# Altium PCB CT310高端控制盒核心板电路V1.3.PcbDoc (part 9 of 10)
Units mil, origin at the board's own origin, x right, y up, seen from the top; angles counter-clockwise.
Board outline 3735.76 x 4625 mil, 2 copper layers (TOP, BOTTOM), stack 10.4 mil thick; 198 components, 362 nets, 1085 pads, 352 vias.
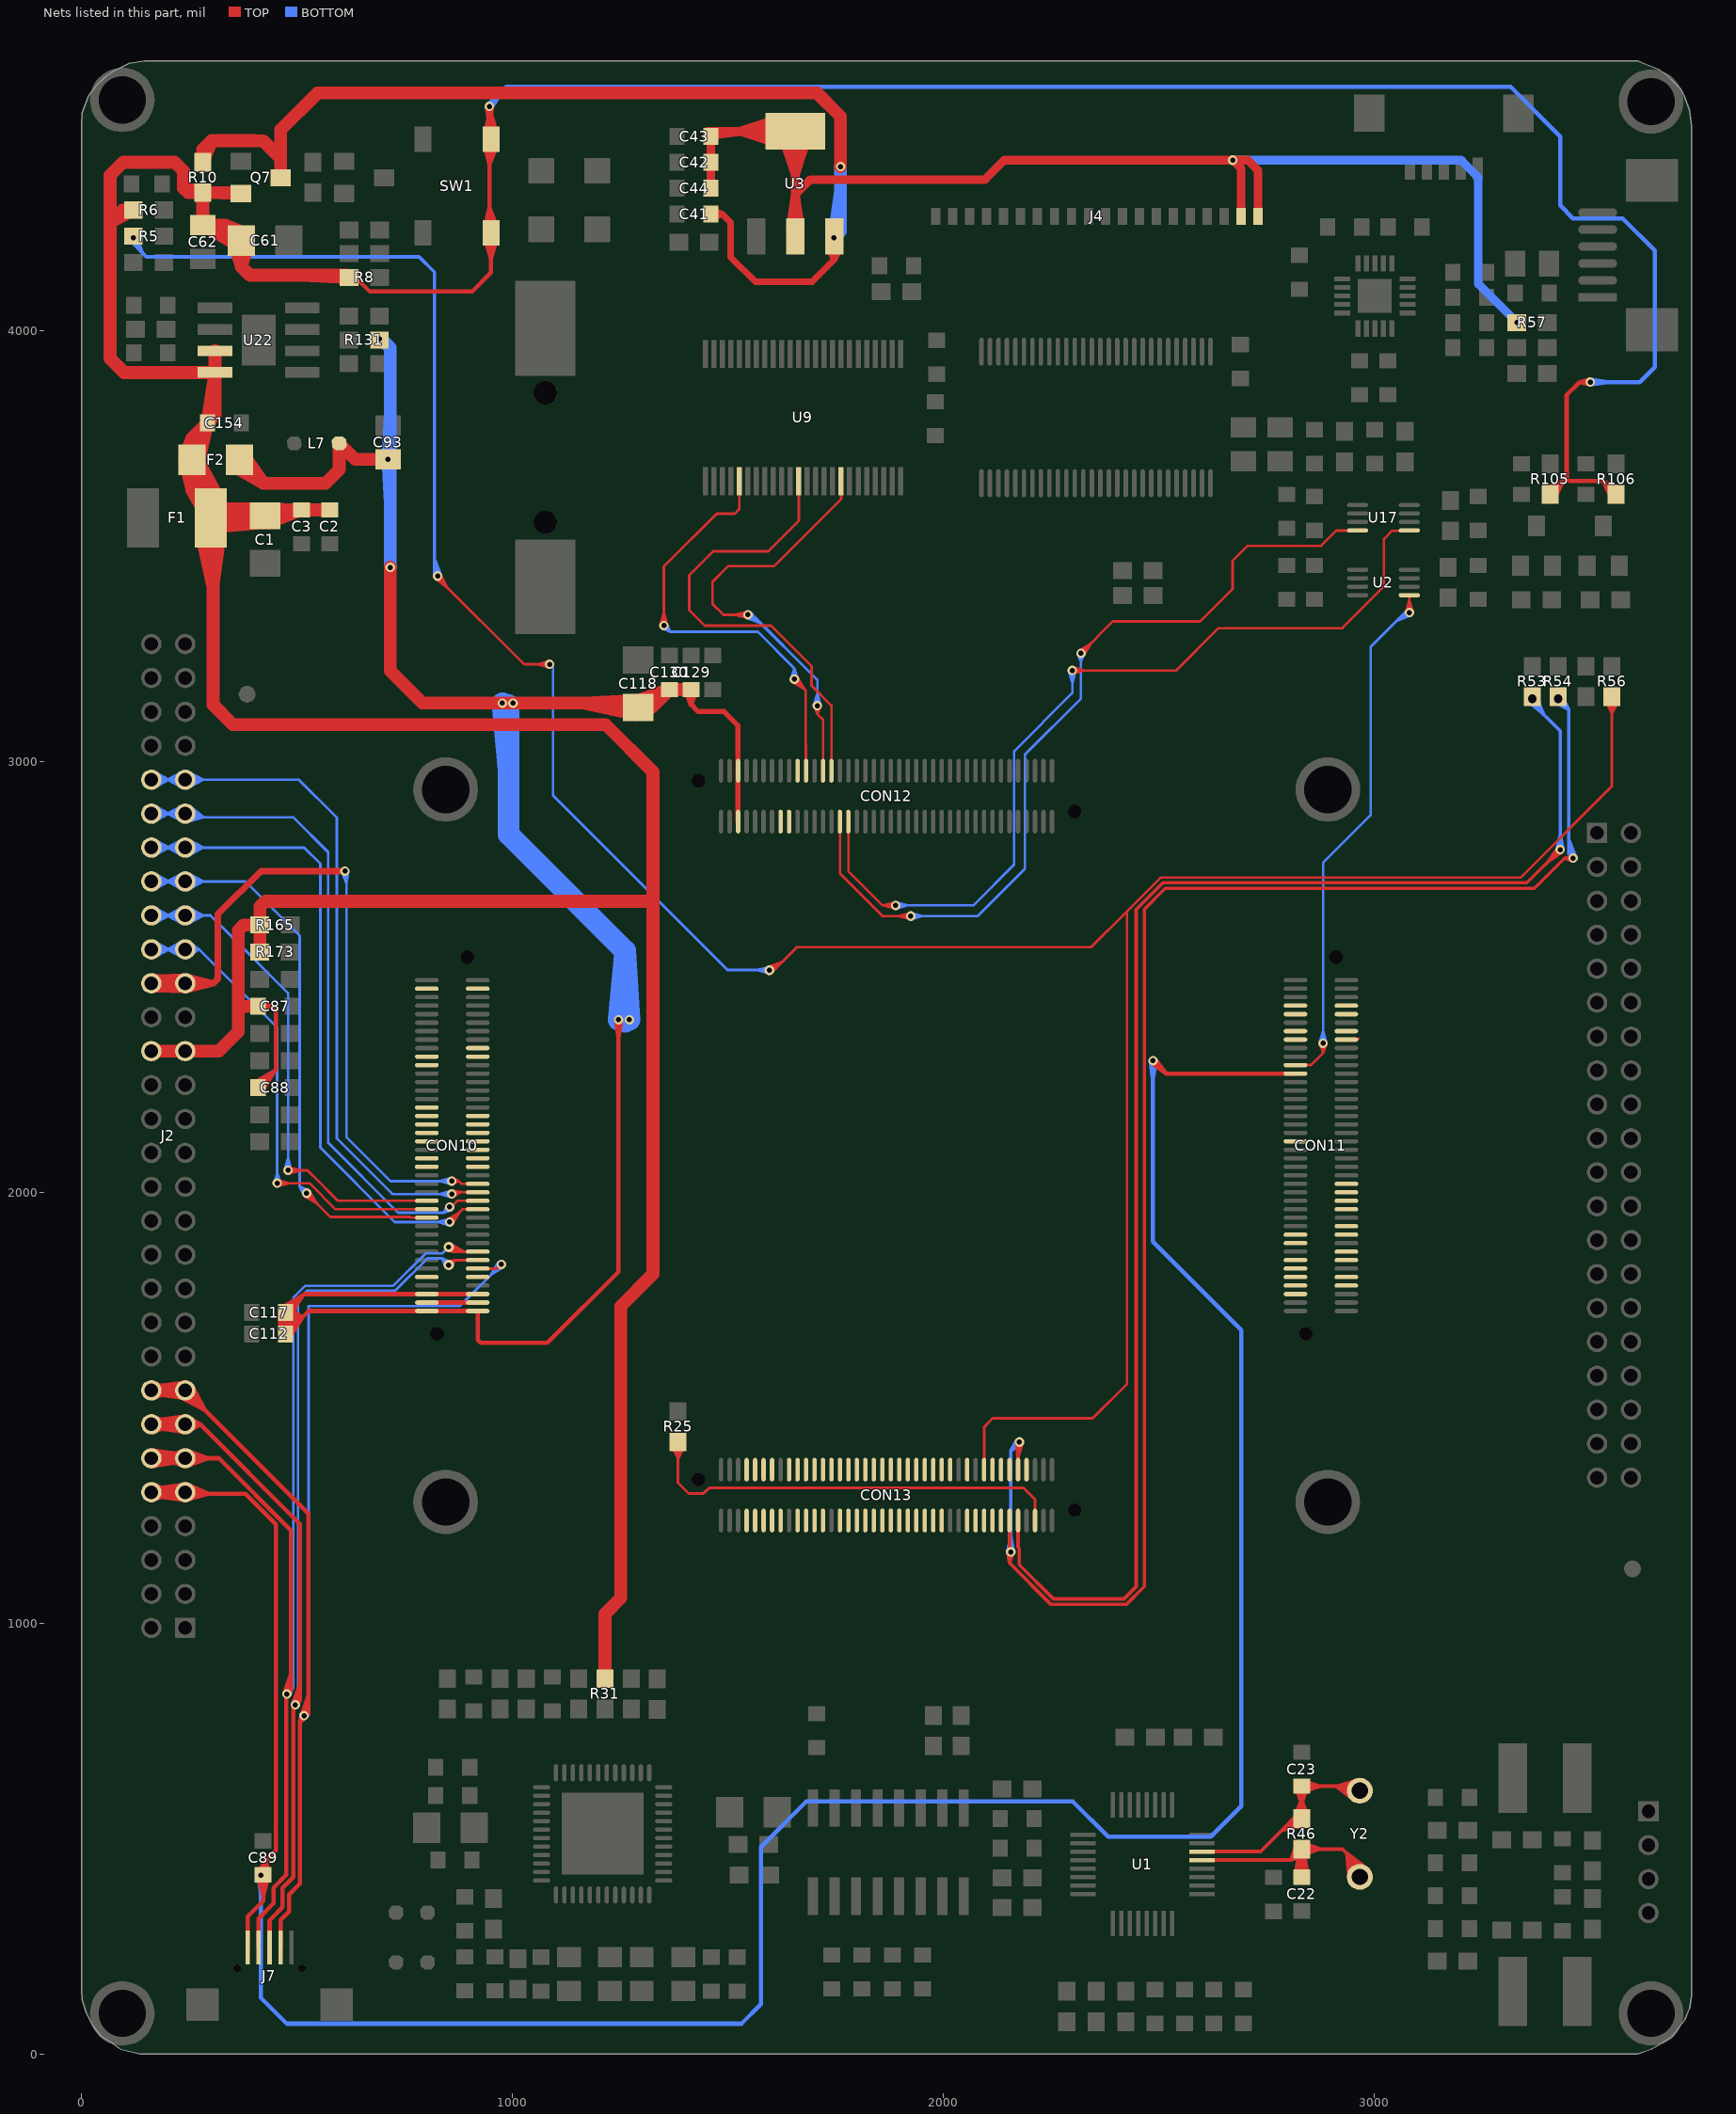
[diagram p9: the nets of this part, all layers, seen from the top]

## Via types
v1: diameter 22, hole 12, TOP to BOTTOM, tented both sides, 177 vias
v2: diameter 22, hole 12, TOP to BOTTOM, 89 vias
v3: diameter 28, hole 16, TOP to BOTTOM, 37 vias
v4: diameter 30, hole 20, TOP to BOTTOM, tented both sides, 26 vias
v5: diameter 24, hole 12, TOP to BOTTOM, 17 vias
v6: diameter 50, hole 30, TOP to BOTTOM, tented both sides, 5 vias
v7: diameter 40, hole 24, TOP to BOTTOM, 1 vias

## Nets (pads, with @x,y where several pads share a name; then routed paths per layer and width w, separated by ;. In a path a pad name is that pad's centre, name@x,y a point inside that pad or via, vN(x,y) a via of type N, cw(c..) or ccw(c..) an arc to the next point about the centre after c; other vN are vias at no path point) (continued)
VSYS: C1.1 C2.1 C3.1 C61.1 C62.1 C87.1 C88.1 C154.1 F1.2 F2.1 J2.35 J2.36 Q7.2 R6.2 R8.1 R10.1 R31.2 R105.2 R106.2 R165.2 R173.2 SW1.1 SW1.2 U22.3 U22.4 | length 22431.9
  TOP w10: C88.1@401.64,2254.59 448.17,2281.36 ; C88.1@409.24,2242.43 450.76,2283.94 450.76,2420 439.55,2431.21 ; C88.1@409.24,2244.4 448.17,2281.36 ; C87.1@409.24,2431.21 439.55,2431.21 ; C87.1@411.91,2418.78 439.55,2431.21 ; C87.1@411.91,2443.65 439.55,2431.21 ; C88.1@419.03,2236.28 448.17,2281.36 ; R8.1@620.01,4122.85 635.39,4122.85 668.25,4090 905.76,4090 949.5,4133.74 SW1.1@949.5,4226.73 945.76,4230.47 v1(945.76,4520) 949.5,4478.32 ; SW1.1@934.85,4237.64 945.76,4286.48 ; SW1.2@934.85,4432.36 945.76,4383.57 ; SW1.2@934.85,4454.18 945.76,4502.88 ; SW1.1@934.98,4214.72 949.5,4167.2 ; SW1.2@934.98,4455.28 949.5,4502.8 ; v1@939.78,4519.56 945.76,4479 v1@951.74,4519.56 ; v1@939.84,4519.04 949.5,4478.32 ; SW1.1@949.5,4216.89 949.5,4167.2 ; SW1.1@949.5,4236.57 945.76,4286.48 ; SW1.2@949.5,4433.43 945.76,4383.57 ; SW1.2@949.5,4443.27 v1@949.5,4516.26 ; v1@951.76,4520.11 949.5,4478.32 ; SW1.1@963.82,4239.81 945.76,4286.48 ; SW1.2@963.82,4430.19 945.76,4383.57 ; SW1.2@963.82,4456.35 945.76,4502.88 ; SW1.1@964.02,4214.72 949.5,4167.2 ; SW1.2@964.02,4455.28 949.5,4502.8 ; R105.2@3399.44,3633.86 3437.86,3650 ; R105.2@3407.43,3619.57 3437.86,3650 ; R105.2@3407.43,3621.54 3437.86,3650 ; R105.2@3419.19,3612.75 3437.86,3650 ; v1@3500.04,3874.04 3475.76,3880 ; v1@3500.04,3885.96 3475.76,3880 ; v1(3500.76,3880) 3475.76,3880 ; R106.2@3549,3612.75 3530.33,3650 ; R106.2@3560.76,3619.57 3530.33,3650 ; R106.2@3560.76,3621.54 3530.33,3650 ; R106.2@3568.74,3633.86 3530.33,3650 ; 945.76,4502.88 949.5,4453.11 949.5,4502.8 ; 3437.86,3650 3445.76,3657.9 3445.76,3850 3475.76,3880 ; 3437.86,3650 3530.33,3650
  TOP w30: R6.2@119.76,4279.28 95.04,4279.28 ; J2.36@161.39,2327.22 J2.35@240.13,2327.22 317.98,2327.22 363.26,2372.5 363.26,2433.71 ; 179.13,3902.35 U22.4@281.63,3902.35 ; F1.2@277.28,3530.66 304.5,3406.02 ; F1.2@277.4,3592.84 F2.1@272.01,3694.04 ; F1.2@278.11,3589.85 F2.1@255.64,3700 ; F1.2@278.18,3589.62 F2.1@255.64,3696.06 ; F1.2@279.38,3586.65 F2.1@239.27,3694.04 ; R10.1@280.76,4317.6 C62.1@280.76,4244.37 ; R10.1@280.76,4321.54 235.76,4330 ; F1.2@295.76,3563.74 F1.2@299.99,3567.97 ; F1.2@295.76,3588.74 255.64,3628.86 ; F1.2@297.67,3587.33 C1.1@419.9,3586.09 ; F1.2@299.38,3542.6 C1.1@420.36,3553.17 ; F1.2@299.5,3533.5 304.5,3406.02 ; F1.2@300.71,3587.37 C1.1@421.25,3569.65 ; F1.2@300.97,3587.35 C1.1@425.19,3567.97 ; F1.2@302.02,3542.74 C1.1@425.19,3567.97 ; F1.2@302.41,3542.79 C1.1@421.25,3569.65 ; F1.2@303.73,3587 C1.1@420.36,3553.17 ; C154.1@304.13,3797.74 C154.1@291.39,3785 ; F1.2@304.5,3605 304.5,3131.26 350.76,3085 1215.76,3085 1325.76,2975 1325.76,1810 1250.76,1735 1250.76,1057.94 1213.97,1021.16 1213.97,900 1213.97,872.97 1213.97,982.66 ; F1.2@305.37,3543.38 C1.1@419.9,3586.09 ; U22.4@309.13,3899.61 C154.1@291.39,3786.97 ; U22.3@309.13,3945 U22.4@309.13,3902.35 ; U22.3@309.13,3952.35 U22.4@309.13,3902.35 ; F1.2@317.32,3610.07 F2.1@239.27,3694.04 ; F1.2@318.96,3607.59 F2.1@255.64,3696.06 ; F1.2@319.15,3607.25 F2.1@255.64,3700 ; F1.2@320.26,3604.92 F2.1@272.01,3694.04 ; F1.2@321.88,3532.41 304.5,3406.02 ; C61.1@353.76,4201.49 370.07,4147.97 ; Q7.2@362.9,4319.57 R10.1@280.76,4319.57 ; Q7.2@365.25,4317.5 R10.1@280.76,4319.57 ; C61.1@370.07,4203.92 370.07,4147.97 ; C61.1@386.39,4201.49 370.07,4147.97 ; R165.2@411.21,2620 375.76,2620 ; C1.1@425.19,3569.65 C1.1@438.97,3583.43 ; 507.75,4127.85 R8.1@618.04,4122.85 ; R8.1@620.01,4122.85 615.01,4127.85 390.19,4127.85 370.07,4147.97 ; 1315.76,2675 425.76,2675 413.18,2662.42 R165.2@413.18,2620 ; 65.76,4250 R6.2@117.79,4279.28 ; 65.76,4250 95.04,4279.28 ; 65.76,4250 65.76,3935 98.41,3902.35 U22.4@309.13,3902.35 ; 65.76,4250 65.76,4360 95.76,4390 215.76,4390 235.76,4370 235.76,4330 ; 95.04,4279.28 R6.2@117.79,4279.28 ; 95.04,4279.28 R6.2@117.79,4279.28 ; 235.76,4330 246.19,4319.57 ; F2.1@239.27,3694.04 F1.2@299.5,3596.5 ; F2.1@239.27,3694.04 255.64,3628.86 ; 246.19,4319.57 R10.1@280.76,4319.57 ; 246.19,4319.57 R10.1@280.76,4319.57 ; 255.64,3628.86 F1.2@299.5,3596.5 ; 255.64,3628.86 F1.2@308.81,3616.87 ; 255.64,3628.86 F1.2@282.78,3581.59 ; 255.64,3628.86 F1.2@299.5,3596.5 ; 255.64,3628.86 F1.2@308.81,3616.87 ; 255.64,3628.86 F1.2@282.78,3581.59 ; 255.64,3628.86 F1.2@299.5,3596.5 ; 255.64,3628.86 F1.2@308.81,3616.87 ; 255.64,3628.86 F1.2@282.78,3581.59 ; 255.64,3628.86 F1.2@299.5,3596.5 ; 255.64,3628.86 F1.2@308.81,3616.87 ; 255.64,3628.86 F1.2@282.78,3581.59 ; 255.64,3628.86 F1.2@299.5,3596.5 ; 255.64,3628.86 F1.2@308.81,3616.87 ; 255.64,3628.86 F1.2@282.78,3581.59 ; 255.64,3628.86 F2.1@255.64,3696.06 ; 255.64,3628.86 F2.1@272.01,3694.04 ; 255.64,3628.86 F2.1@255.64,3700 ; F2.1@255.64,3696.06 F1.2@299.5,3596.5 ; F2.1@255.64,3700 F1.2@299.5,3596.5 ; F2.1@255.64,3700 255.64,3749.25 ; F2.1@255.64,3703.94 C154.1@291.39,3783.03 ; F2.1@255.64,3703.94 255.64,3749.25 ; F2.1@255.64,3703.94 255.64,3749.25 ; F2.1@255.64,3703.94 C154.1@291.39,3785 ; 255.64,3749.25 C154.1@291.39,3783.03 ; 255.64,3749.25 271.86,3706.94 255.64,3749.25 ; 255.64,3749.25 239.42,3706.94 255.64,3749.25 ; 255.64,3749.25 C154.1@291.39,3785 ; F2.1@272.01,3694.04 F1.2@299.5,3596.5 ; C62.1@280.76,4244.37 C61.1@370.07,4211.79 ; C62.1@280.76,4244.37 374.36,4227.72 C62.1@286.67,4244.37 ; C62.1@280.76,4244.37 363.09,4196.84 C62.1@286.67,4244.37 ; C62.1@280.76,4244.37 R10.1@280.76,4319.57 ; C62.1@280.76,4244.37 333.55,4244.37 ; C62.1@286.67,4244.37 C61.1@370.07,4211.79 ; C62.1@286.67,4244.37 333.55,4244.37 ; C154.1@291.39,3783.03 241.23,3711.97 C154.1@291.39,3785 ; C154.1@291.39,3783.03 271.29,3698.72 C154.1@291.39,3785 ; C154.1@291.39,3785 309.13,3802.74 ; C154.1@291.39,3786.97 309.13,3802.74 ; C154.1@291.39,3786.97 309.13,3802.74 ; F1.2@299.5,3565 C1.1@421.25,3569.65 ; F1.2@299.5,3565 C1.1@419.9,3586.09 ; F1.2@299.5,3565 C1.1@420.36,3553.17 ; F1.2@299.5,3565 C1.1@425.19,3567.97 ; F1.2@299.99,3567.97 C1.1@421.25,3569.65 ; F1.2@299.99,3567.97 C1.1@419.9,3586.09 ; F1.2@299.99,3567.97 C1.1@420.36,3553.17 ; F1.2@299.99,3567.97 C1.1@425.19,3567.97 ; 309.13,3802.74 U22.4@309.13,3902.35 ; 333.55,4244.37 C61.1@370.07,4211.79 ; 333.55,4244.37 378.82,4225.77 333.55,4244.37 ; 333.55,4244.37 357.17,4201.51 333.55,4244.37 ; 333.55,4244.37 C61.1@370.07,4211.79 ; 333.55,4244.37 C61.1@370.07,4207.85 370.07,4147.97 ; 363.26,2433.71 363.26,2607.5 375.76,2620 ; 363.26,2433.71 365.76,2431.21 ; 365.76,2431.21 C87.1@409.24,2431.21 365.76,2431.21 ; 375.76,2620 R165.2@413.18,2620 ; R165.2@413.18,2620 R173.2@413.18,2557.07 R165.2@413.18,2620 ; C1.1@438.97,3583.43 C3.1@508.22,3583.43 ; C1.1@438.97,3583.43 C3.1@510.19,3583.43 ; C3.1@508.22,3583.43 429.13,3569.65 C3.1@510.19,3583.43 ; C3.1@508.22,3583.43 433.51,3553.74 C3.1@510.19,3583.43 ; C3.1@508.22,3583.43 428.01,3586.1 C3.1@510.19,3583.43 ; C3.1@510.19,3583.43 573.22,3583.43 512.16,3583.43 C2.1@575.19,3583.43 C3.1@510.19,3583.43
  BOTTOM w10: v1@941.47,4524.19 975.09,4554.33 ; v1@950.57,4516.41 975.09,4554.33 ; v1(3500.76,3880) 3615.76,3880 3650.76,3915 3650.76,4185 3575.76,4260 3460.76,4260 3430.76,4290 3430.76,4450 3315.76,4565 985.76,4565 945.76,4525 v1(945.76,4520) 975.09,4554.33 ; v1@3501.2,3874.02 3541.76,3880 v1@3501.2,3885.98
VSYS_K: C93.1 C112.1 C117.1 C118.1 C129.1 C130.1 CON10.1 CON10.2 CON10.3 CON10.4 CON10.5 CON10.6 CON12.75 CON12.76 F2.2 L7.2 R131.1 | length 9782.6
  TOP w10: C117.1@460.28,1719.04 C112.1@465.38,1682.73 ; C117.1@460.38,1716.91 C112.1@472.98,1670.89 ; C117.1@460.39,1716.85 C112.1@472.98,1672.54 ; C117.1@460.39,1720.36 C112.1@460.38,1674.23 ; C117.1@461.35,1713.47 C112.1@485.59,1674.23 ; C117.1@465.38,1732.73 511.91,1759.5 ; C117.1@472.1,1705.92 511.91,1709.5 ; C117.1@472.98,1722.54 511.91,1759.5 ; C117.1@477.81,1730.37 511.91,1709.5 ; C112.1@482.77,1664.42 511.91,1709.5 ; C117.1@482.77,1714.42 511.91,1759.5 ; C117.1@484.62,1713.47 C112.1@460.38,1674.23 ; C117.1@484.78,1713.85 C112.1@465.38,1682.73 ; C117.1@485.58,1716.85 C112.1@472.98,1672.54 ; C117.1@485.58,1720.36 C112.1@485.59,1674.23 ; C117.1@485.59,1716.91 C112.1@472.98,1670.89 ; 743.16,1724.04 CON10.1@778.16,1724.04 ; 743.16,1763.41 CON10.5@778.16,1763.41 ; CON10.3@800.66,1743.72 CON10.4@918.77,1743.72 ; CON10.1@823.16,1724.04 858.16,1724.04 ; CON10.3@823.16,1743.72 858.16,1743.72 ; CON10.5@823.16,1763.41 858.16,1763.41 ; 861.27,1724.04 CON10.2@896.27,1724.04 ; 861.27,1743.72 CON10.4@896.27,1743.72 ; 861.27,1763.41 CON10.6@896.27,1763.41 ; CON10.6@918.77,1763.41 CON10.5@800.66,1763.41 515.82,1763.41 C117.1@472.98,1720.57 C112.1@472.98,1670.57 526.45,1724.04 CON10.1@800.66,1724.04 CON10.2@918.77,1724.04 918.77,1656.99 925.76,1650 1080.76,1650 1245.76,1815 v1(1245.76,2400) ; v1@1239.78,2399.56 1245.76,2359 v1@1251.74,2399.56 ; C112.1@460.38,1674.23 C117.1@472.98,1718.6 ; C112.1@460.38,1674.23 C117.1@472.98,1720.26 ; C112.1@465.38,1682.73 C117.1@472.98,1718.6 ; C112.1@465.38,1682.73 511.91,1709.5 ; C112.1@472.98,1670.89 C117.1@472.98,1718.6 ; C112.1@472.98,1672.54 C117.1@472.98,1718.6 ; C112.1@472.98,1672.54 C117.1@472.98,1720.26 ; C112.1@472.98,1672.54 511.91,1709.5 ; C117.1@472.98,1718.6 C112.1@485.59,1674.23 ; C117.1@472.98,1718.6 511.91,1709.5 ; C117.1@472.98,1720.26 C112.1@485.59,1674.23
  TOP w12: C129.1@1402.54,3164.69 1413.61,3132.15 ; C129.1@1413.61,3166.52 1413.61,3132.15 ; C129.1@1414.11,3166.52 1413.61,3132.15 ; C129.1@1425.63,3164.35 1413.61,3132.15 ; CON12.75@1523.1,2859.86 CON12.76@1523.1,2977.98 1523.1,3082.66 1490.76,3115 1430.76,3115 1413.61,3132.15 ; CON12.75@1523.1,2882.36 1523.1,2923.36 ; 1523.1,2914.48 CON12.76@1523.1,2955.48 ; CON12.76@1523.1,3000.48 1523.1,3041.48
  TOP w30: F2.2@356.05,3682.81 420.88,3645 ; F2.2@365.88,3696.06 420.88,3645 ; F2.2@365.88,3700 420.88,3645 ; F2.2@378.36,3706.85 420.88,3645 ; C93.1@704.85,3700.63 634.58,3700.63 ; v1(715.76,3450) 715.76,3210 790.76,3135 1280.64,3135 C118.1@1290.76,3124.88 C118.1@1321.98,3124.88 ; C118.1@1284.38,3108.57 1163.64,3135 ; C118.1@1286.82,3124.88 1163.64,3135 ; C118.1@1287.07,3141.38 1163.64,3135 ; C118.1@1287.5,3139.72 C130.1@1361.65,3166.52 ; C118.1@1287.66,3139.8 C130.1@1363.61,3166.52 ; C118.1@1304.63,3111.71 C130.1@1363.61,3166.52 ; C118.1@1304.83,3111.86 C130.1@1361.65,3166.52 ; 420.88,3645 565.76,3645 597.35,3676.59 L7.2@597.35,3737.85 634.58,3700.63 ; 634.58,3700.63 v1(710.76,3700.63) ; 634.58,3700.63 v1(710.76,3700.63) ; 634.58,3700.63 v1(710.76,3700.63) ; C118.1@1321.98,3124.88 C130.1@1361.65,3166.52 ; C118.1@1321.98,3124.88 C130.1@1363.61,3166.52 ; C130.1@1361.65,3166.52 1294.7,3124.88 C130.1@1363.61,3166.52 ; C130.1@1363.61,3166.52 1412.15,3166.52 1365.58,3166.52 1413.61,3166.52 C130.1@1363.61,3166.52
  BOTTOM w10: v1@1250.76,2395 v1@1250.76,2400
  BOTTOM w30: v1(715.76,3450) 715.76,3551 ; v1@715.76,3455 715.76,3960 ; 715.76,3598.64 v1(710.76,3700.63) 715.76,3802.63 ; 715.76,3960 v1(690.76,3980) 695.76,3980 715.76,3960
  BOTTOM w50: 990.76,2966.83 v1(975.76,3135) 990.76,3130 990.76,2830 1260.76,2560 ; v1(1245.76,2400) v1(1270.76,2400) ; v1(1245.76,2400) v1(1270.76,2400) ; v1(1245.76,2400) 1260.76,2395 1260.76,2560 ; v1(1245.76,2400) 1260.76,2560 ; 1260.76,2560 v1(1270.76,2400) ; 1260.76,2560 v1(1270.76,2400)
  other v1: 1000.76,3135
VSYS_LCD: C41.2 Q7.3 R10.2 U3.3 | length 2972.8
  TOP w15: C41.2@1460.13,4270 1485.76,4270 ; C41.2@1462.17,4259.99 1485.76,4270 ; C41.2@1462.17,4280.01 1485.76,4270 ; U3.3@1732.48,4194.3 1746.31,4163.73 ; U3.3@1746.31,4215 1746.31,4163.73 ; U3.3@1760.15,4194.3 1746.31,4163.73 ; 1485.76,4270 1505.76,4250 1505.76,4170 1563.26,4112.5 1695.08,4112.5 1746.31,4163.73 ; v1(1745.76,4215) 1746.31,4163.73 ; v1(1745.76,4215) 1746.31,4197.28 1746.31,4163.73 ; v1(1745.76,4215) 1746.31,4163.73
  TOP w30: R10.2@280.76,4390.43 280.76,4420 ; Q7.3@461.69,4354.5 461.69,4399.07 ; v1(1760.76,4380) 1760.76,4496.55 1706.31,4551 546.76,4551 461.69,4465.93 461.69,4399.07 ; R10.2@280.76,4392.4 280.76,4420 ; R10.2@280.76,4392.4 301.3,4440.54 ; R10.2@280.76,4392.4 280.76,4420 ; 280.76,4420 301.3,4440.54 ; 301.3,4440.54 401.1,4440.54 401.63,4440 420.76,4440 461.69,4399.07
  BOTTOM w30: 1760.76,4322.8 v1(1745.76,4215) ; v1(1760.76,4380) 1760.76,4230 ; v1(1745.76,4215) 1760.76,4230 ; v1(1745.76,4215) 1760.76,4230
VSYS_LCD_3.3V: C42.2 C43.2 C44.2 J4.1 J4.2 R57.2 U3.2 U3.4 | length 4622.8
  TOP w20: C43.2@1452.18,4462.05 U3.4@1655.76,4462.05 1655.76,4315 ; C43.2@1460.13,4451.97 1540.09,4462.05 ; C43.2@1472.18,4462.05 C43.2@1460.13,4450 ; U3.4@1623.84,4456.94 1655.76,4359.72 ; U3.4@1624.08,4430.13 1526.86,4462.05 ; U3.4@1624.08,4493.96 1526.86,4462.05 ; U3.4@1628.44,4449.75 1526.86,4462.05 ; U3.4@1628.44,4474.35 1526.86,4462.05 ; U3.4@1629.19,4462.05 1526.86,4462.05 ; U3.4@1643.46,4461.31 1655.76,4359.72 ; U3.2@1644.14,4239.51 1655.76,4315 ; U3.2@1655.76,4217.95 1655.76,4315 ; U3.2@1655.76,4238.62 1655.76,4315 ; U3.2@1667.38,4239.51 1655.76,4315 ; U3.4@1668.06,4461.31 1655.76,4359.72 ; U3.4@1687.68,4456.94 1655.76,4359.72 ; J4.2@2690.41,4265 2690.41,4375.35 v1(2670.76,4395) ; J4.2@2690.41,4273.86 2690.41,4344.69 ; J4.1@2729.78,4265 2729.78,4370.98 2705.76,4395 v1(2670.76,4395) ; J4.1@2729.78,4273.86 2729.78,4344.69 ; C42.2@1460.13,4390 1460.13,4448.03 1460.13,4391.97 C43.2@1460.13,4450 ; C42.2@1460.13,4390 1460.13,4331.97 1460.13,4388.03 C44.2@1460.13,4330 C42.2@1460.13,4390 ; C42.2@1460.13,4390 C43.2@1460.13,4450 ; 1655.76,4315 1690.76,4350 2095.76,4350 2140.76,4395 v1(2670.76,4395)
  BOTTOM w20: v1(2670.76,4395) 3200.76,4395 3240.76,4355 3240.76,4107.9 v1(3330.33,4018.33)
W_PMU_EN: CON13.8
WIFI_CLK: CON10.37
WIFI_CMD: CON10.38
WIFI_D0: CON10.41
WIFI_D1: CON10.40
WIFI_D2: CON10.43
WIFI_D3: CON10.42
WIFI_PWDN: CON10.36
WIFI_WOW: CON10.35
XADCAIN0: CON11.49
XADCAIN1: CON11.51
XADCAIN2: CON11.53
XADCAIN3: CON11.55
XCIFIELD: CON11.40
XCLKOUT: CON10.59
XEINT1_BAK: CON13.16
XEINT6: CON13.18 R5.2 R56.2 | length 7878
  TOP w6: R5.2@112.4,4218.16 R5.2@110.19,4202.85 ; R5.2@118.47,4207.1 R5.2@138.69,4207.85 ; R5.2@124,4221.78 R5.2@138.69,4207.85 ; R5.2@124.55,4208.59 R5.2@110.19,4202.85 ; v1@820.25,3424.2 847.4,3403.92 ; v1@832.48,3434.35 847.4,3403.92 ; v1@1084.66,3217.08 1056.76,3225 ; v1@1084.66,3232.92 1056.76,3225 ; v1@1592.15,2522.14 1625.08,2534.32 ; v1@1600.89,2508.86 1625.08,2534.32 ; CON13.18@2093.97,1355.93 2093.97,1455 2113.97,1475 2345.76,1475 2425.76,1555 2425.76,2651.97 ; CON13.18@2093.97,1378.43 2093.97,1401.43 ; R56.2@3534.49,3143.9 3550.76,3109.91 ; R56.2@3540.18,3146.08 3550.76,3109.91 ; R56.2@3546.08,3147.31 3550.76,3109.91 ; R56.2@3550.76,3147.6 3550.76,3109.91 ; R56.2@3550.76,3149.57 3550.76,2941.87 3338.89,2730 2503.79,2730 2425.76,2651.97 ; R56.2@3555.44,3147.31 3550.76,3109.91 ; R56.2@3561.34,3146.08 3550.76,3109.91 ; R56.2@3567.03,3143.9 3550.76,3109.91 ; R5.2@110.19,4202.85 v2(119.76,4215) ; R5.2@110.19,4202.85 R5.2@114.19,4202.85 ; R5.2@114.19,4202.85 v2(119.76,4215) ; R5.2@114.19,4202.85 111.82,4216 R5.2@114.19,4202.85 ; R5.2@114.19,4202.85 125.7,4209.64 R5.2@114.19,4202.85 ; R5.2@114.19,4202.85 v2(119.76,4215) ; R5.2@114.19,4202.85 119.19,4207.85 R5.2@138.69,4207.85 ; v2(119.76,4215) R5.2@138.69,4207.85 ; 847.4,3403.92 v1(825.76,3430) 825.76,3425.56 1026.32,3225 v1(1085.76,3225) 1056.76,3225 ; 1625.08,2534.32 v1(1595.76,2515) 1605.76,2515 1659.25,2568.49 2342.27,2568.49 2425.76,2651.97
  BOTTOM w6: v1(1085.76,3225) 1093.61,3217.15 1093.61,2920.57 1498.61,2515.57 v1@1595.76,2515.57 ; v1@1594.5,2507.1 1566.75,2515.57 ; v1@1594.81,2522.94 1566.75,2515.57 ; v1(1595.76,2515) 1566.75,2515.57
  BOTTOM w8: v2@114.08,4210.91 140.37,4180.39 ; v2@126.06,4218.05 140.37,4180.39 ; v1@818.79,3429.35 818.61,3469.17 ; v1@832.51,3431.86 818.61,3469.17 ; 119.76,4201 v2(119.76,4215) ; 119.76,4201 112.98,4213.25 119.76,4201 ; 119.76,4201 126.53,4213.25 119.76,4201 ; 119.76,4201 v2(119.76,4215) ; 119.76,4201 149.91,4170.85 782.76,4170.85 818.61,4135 818.61,3437.15 v1(825.76,3430) 818.61,3469.17 ; v2(119.76,4215) 140.37,4180.39
XEINT7/GPX0_7: CON10.32 J2.39 J2.40 | length 2626.7
  TOP w6: v2(858.61,2025.57) 874.61,2025.57 ; v2@860.61,2017.83 874.61,2025.57 ; v2@860.61,2033.32 874.61,2025.57 ; CON10.32@896.27,2019.31 880.87,2019.31 ; CON10.32@918.77,2019.31 880.87,2019.31 ; 874.61,2025.57 880.87,2019.31
  TOP w15: J2.40@161.39,2484.7 J2.39@240.13,2484.7 ; J2.40@163.28,2468.69 230.01,2484.7 J2.40@163.28,2500.71 ; J2.39@235.09,2469.39 J2.40@172.28,2498.55 ; J2.39@235.09,2500.01 J2.40@172.28,2470.85 ; J2.39@238.24,2468.69 171.51,2484.7 J2.39@238.24,2500.71 ; J2.39@241.49,2468.64 J2.40@172.28,2470.85 ; J2.39@241.49,2500.76 J2.40@172.28,2498.55 ; J2.39@242.12,2468.7 305.46,2484.7 ; J2.39@242.12,2500.7 305.46,2484.7 ; v1(610.76,2745) 415.76,2745 315.76,2645 315.76,2495 305.46,2484.7 ; J2.40@172.28,2470.85 J2.39@240.13,2484.7 ; J2.40@172.28,2498.55 J2.39@240.13,2484.7 ; J2.39@240.13,2484.7 305.46,2484.7
  BOTTOM w6: v1@603.01,2743.03 614.11,2715.52 ; v1(610.76,2745) 614.11,2715.52 ; v1@614.11,2745 614.11,2128.24 716.78,2025.57 v2(858.61,2025.57) ; v1@618.76,2744.82 614.11,2715.52 ; v2@857.51,2017.65 829.61,2025.57 v2@857.51,2033.49
XEINT14_BAK: CON13.22
XEINT18/KP_ROW2/ALV_DBG14: CON10.48
XEINT29/KP_ROW13/ALV_DBG25: CON10.49
XEINT30/HDMI_CEC/ALV_DBG26: CON11.22 U2.5 | length 1562
  TOP w6: CON11.22@2816.4,2294.91 2852.9,2294.91 ; CON11.22@2838.9,2294.91 2852.9,2294.91 ; v2@2872.74,2344.18 2880.61,2322.62 ; v2@2888.49,2344.18 2880.61,2322.62 ; v1@3072.84,3346.11 3080.8,3374 ; U2.5@3080.8,3385.47 v1(3080.76,3345) v1(3080.76,3345) 3080.8,3374 ; v1@3088.68,3346.09 3080.8,3374 ; 2852.9,2294.91 2880.61,2322.62 ; 2880.61,2322.62 v2(2880.61,2345.57) 2880.61,2322.62
  BOTTOM w6: v2@2872.69,2346.67 2880.61,2374.57 v2@2888.54,2346.67 ; v2(2880.61,2345.57) 2880.61,2764.85 2990.76,2875 2990.76,3265 3070.76,3345 v1(3080.76,3345) 3051.08,3325.32 ; v1@3075.62,3351.13 3051.08,3325.32 ; v1@3084.4,3337.88 3051.08,3325.32
XHDMITX0N: CON11.9
XHDMITX0P: CON11.7
XHDMITX1N: CON11.10
XHDMITX1P: CON11.8
XHDMITX2N: CON11.15 | length 9.8
  TOP w6: CON11.15@2957.02,2353.95 2962.58,2356.57 CON11.15@2959.96,2353.95
XHDMITX2P: CON11.13
XHDMITXCN: CON11.16
XHDMITXCP: CON11.14
XI2S0CDCLK/PCM_0_EXTCLK: CON11.71
XI2S0LRCK/PCM_0_FSYNC: CON11.70
XI2S0SCLK/PCM_0_SCLK: CON11.68
XI2S0SDI/PCM_0_SIN: CON11.74
XI2S0SDO_0/PCM_0_SOUT: CON11.72
XISPI2C1SCL: CON13.30
XISPI2C1SDA: CON13.32
XISPSPICLK: CON13.26
XISPSPICSN: CON13.19
XISPSPIMISO: CON13.21
XISPSPIMOSI: CON13.28
XJTCK: CON13.13
XJTDI: CON13.14
XJTDO: CON13.15
XJTMS: CON13.12
XJTRSTN: CON13.17
XM0ADDR0: CON13.65
XM0ADDR1: CON13.68
XM0ADDR2: CON13.67
XM0ADDR3: CON13.70
XM0ADDR4: CON13.69
XM0ADDR5: CON13.72
XM0ADDR6: CON13.71
XM0ADDR7: CON13.74
XM0BEN0: CON13.43
XM0CS0: CON13.73
XM0CS1: CON13.46
XM0DATA0: CON13.45
XM0DATA1: CON13.50
XM0DATA2: CON13.47
XM0DATA3: CON13.52
XM0DATA4: CON13.49
XM0DATA5: CON13.54
XM0DATA6: CON13.51
XM0DATA7: CON13.56
XM0DATA8: CON13.55
XM0DATA9: CON13.58
XM0DATA10: CON13.57
XM0DATA11: CON13.60
XM0DATA12: CON13.59
XM0DATA13: CON13.62
XM0DATA14: CON13.61
XM0DATA15: CON13.64
XM0DATA_RDN: CON13.44
XM0OEN: CON13.48
XM0WEN: CON13.41
XMIPI2LSDN0: CON11.64
XMIPI2LSDN1: CON11.67
XMIPI2LSDNCLK: CON11.61
XMIPI2LSDP0: CON11.62
XMIPI2LSDP1: CON11.65
XMIPI2LSDPCLK: CON11.59
XMIPIMDN0: CON13.29
XMIPIMDN1: CON13.33
XMIPIMDN2: CON13.38
XMIPIMDN3: CON13.42
XMIPIMDNCLK: CON13.37
XMIPIMDP0: CON13.27
XMIPIMDP1: CON13.31
XMIPIMDP2: CON13.36
XMIPIMDP3: CON13.40
XMIPIMDPCLK: CON13.35
XMMC2CLK: CON10.26 J2.47 J2.48 | length 2402.9
  TOP w6: v2@848.67,1936.86 877.34,1954.3 v2@859.9,1925.63 ; v2(853.61,1930.57) 883.29,1960.25 ; CON10.26@896.27,1960.25 883.29,1960.25 ; CON10.26@918.77,1960.25 883.29,1960.25
  BOTTOM w6: J2.48@161.39,2799.66 J2.47@240.13,2799.66 516.1,2799.66 553.61,2762.15 553.61,2103.34 726.38,1930.57 v2(853.61,1930.57) ; J2.48@162.28,2791.08 203.01,2799.66 ; J2.48@162.28,2808.24 203.01,2799.66 ; J2.48@163.96,2785.27 203.01,2799.66 ; J2.48@163.96,2814.05 203.01,2799.66 ; J2.48@166.5,2779.68 203.01,2799.66 ; J2.48@166.5,2819.64 203.01,2799.66 ; J2.47@235.02,2779.68 198.51,2799.66 ; J2.47@235.02,2819.64 198.51,2799.66 ; J2.47@237.56,2785.27 198.51,2799.66 ; J2.47@237.56,2814.05 198.51,2799.66 ; J2.47@239.24,2791.08 198.51,2799.66 ; J2.47@239.24,2808.24 198.51,2799.66 ; J2.47@241.02,2791.08 281.75,2799.66 ; J2.47@241.02,2808.24 281.75,2799.66 ; J2.47@242.7,2785.27 281.75,2799.66 ; J2.47@242.7,2814.05 281.75,2799.66 ; J2.47@245.24,2779.68 281.75,2799.66 ; J2.47@245.24,2819.64 281.75,2799.66 ; v2@852.51,1922.65 824.61,1930.57 v2@852.51,1938.49
XMMC2CMD: CON10.23 J2.45 J2.46 | length 2179.2
  TOP w6: v2@516.67,1991.28 545.34,1973.84 v2@527.9,2002.51 ; v2(521.61,1997.57) 576.93,1942.25 761.98,1942.25 763.66,1940.58 ; CON10.23@778.16,1940.58 763.66,1940.58 ; CON10.23@800.66,1940.58 763.66,1940.58
  BOTTOM w6: J2.46@161.39,2720.92 J2.45@240.13,2720.92 379.84,2720.92 505.61,2595.15 505.61,2013.57 ; J2.46@162.28,2712.34 203.01,2720.92 ; J2.46@162.28,2729.5 203.01,2720.92 ; J2.46@163.96,2706.53 203.01,2720.92 ; J2.46@163.96,2735.31 203.01,2720.92 ; J2.46@166.5,2700.94 203.01,2720.92 ; J2.46@166.5,2740.9 203.01,2720.92 ; J2.45@235.02,2700.94 198.51,2720.92 ; J2.45@235.02,2740.9 198.51,2720.92 ; J2.45@237.56,2706.53 198.51,2720.92 ; J2.45@237.56,2735.31 198.51,2720.92 ; J2.45@239.24,2712.34 198.51,2720.92 ; J2.45@239.24,2729.5 198.51,2720.92 ; J2.45@241.02,2712.34 281.75,2720.92 ; J2.45@241.02,2729.5 281.75,2720.92 ; J2.45@242.7,2706.53 281.75,2720.92 ; J2.45@242.7,2735.31 281.75,2720.92 ; J2.45@245.24,2700.94 281.75,2720.92 ; J2.45@245.24,2740.9 281.75,2720.92 ; v2@515.05,1993 505.61,2013.57 ; v2(521.61,1997.57) 505.61,2013.57 ; v2@526.18,2004.14 505.61,2013.57
XMMC2DATA0: CON10.28 J2.49 J2.50 | length 2436.8
  TOP w6: v2(853.61,1965.57) 856.9,1965.57 871.27,1979.94 CON10.28@918.77,1979.94 ; 873.27,1979.94 CON10.28@896.27,1979.94
  BOTTOM w6: J2.50@161.39,2878.4 J2.49@240.13,2878.4 ; J2.50@162.28,2869.82 203.01,2878.4 ; J2.50@162.28,2886.98 203.01,2878.4 ; J2.50@163.96,2864.01 203.01,2878.4 ; J2.50@163.96,2892.79 203.01,2878.4 ; J2.50@166.5,2858.42 203.01,2878.4 ; J2.50@166.5,2898.38 203.01,2878.4 ; J2.49@235.02,2858.42 198.51,2878.4 ; J2.49@235.02,2898.38 198.51,2878.4 ; J2.49@237.56,2864.01 198.51,2878.4 ; J2.49@237.56,2892.79 198.51,2878.4 ; J2.49@239.24,2869.82 198.51,2878.4 ; J2.49@239.24,2886.98 198.51,2878.4 ; J2.49@239.33,2869.82 283.55,2870 ; J2.49@239.76,2863.78 283.55,2870 ; J2.49@241.04,2857.8 283.55,2870 ; J2.49@242.59,2886.67 283.55,2870 ; J2.49@245.24,2892.1 283.55,2870 ; J2.49@248.66,2897.18 283.55,2870 ; v2@846.89,1969.91 840.18,1952.13 ; v2@857.95,1958.85 840.18,1952.13 ; J2.49@240.13,2878.4 283.55,2870 ; J2.49@240.13,2878.4 248.53,2870 490.76,2870 571.61,2789.15 571.61,2114.57 734.05,1952.13 840.18,1952.13 ; 840.18,1952.13 v2(853.61,1965.57) 840.18,1952.13
XMMC2DATA1: CON10.30 J2.51 J2.52 | length 2483.9
  TOP w6: v2@858.25,2003.56 880.61,2000.57 ; v2@861.74,1988.21 880.61,2000.57 ; CON10.30@896.27,1999.62 881.56,1999.62 ; CON10.30@918.77,1999.62 881.56,1999.62 ; 880.61,2000.57 v2(858.61,1995.57) 863.61,2000.57 880.61,2000.57 ; 880.61,2000.57 881.56,1999.62
  BOTTOM w6: J2.52@161.39,2957.14 J2.51@240.13,2957.14 503.62,2957.14 591.76,2869 591.76,2124.42 720.61,1995.57 v2(858.61,1995.57) ; J2.52@162.28,2948.56 203.01,2957.14 ; J2.52@162.28,2965.72 203.01,2957.14 ; J2.52@163.96,2942.75 203.01,2957.14 ; J2.52@163.96,2971.53 203.01,2957.14 ; J2.52@166.5,2937.16 203.01,2957.14 ; J2.52@166.5,2977.12 203.01,2957.14 ; J2.51@235.02,2937.16 198.51,2957.14 ; J2.51@235.02,2977.12 198.51,2957.14 ; J2.51@237.56,2942.75 198.51,2957.14 ; J2.51@237.56,2971.53 198.51,2957.14 ; J2.51@239.24,2948.56 198.51,2957.14 ; J2.51@239.24,2965.72 198.51,2957.14 ; J2.51@241.02,2948.56 281.75,2957.14 ; J2.51@241.02,2965.72 281.75,2957.14 ; J2.51@242.7,2942.75 281.75,2957.14 ; J2.51@242.7,2971.53 281.75,2957.14 ; J2.51@245.24,2937.16 281.75,2957.14 ; J2.51@245.24,2977.12 281.75,2957.14 ; v2@857.51,1987.65 829.61,1995.57 v2@857.51,2003.49
XMMC2DATA2: CON10.25 J2.41 J2.42 | length 1921.8
  TOP w6: v2(453.61,2020.57) 528.61,2020.57 588.93,1960.25 CON10.25@800.66,1960.25 ; v2@454.72,2012.65 482.61,2020.57 v2@454.72,2028.49 ; 755.16,1960.25 CON10.25@778.16,1960.25
  BOTTOM w6: J2.42@161.39,2563.44 J2.41@240.13,2563.44 272.32,2563.44 ; J2.42@162.28,2554.86 203.01,2563.44 ; J2.42@162.28,2572.02 203.01,2563.44 ; J2.42@163.96,2549.04 203.01,2563.44 ; J2.42@163.96,2577.83 203.01,2563.44 ; J2.42@166.5,2543.46 203.01,2563.44 ; J2.42@166.5,2583.42 203.01,2563.44 ; J2.41@235.02,2543.46 198.51,2563.44 ; J2.41@235.02,2583.42 198.51,2563.44 ; J2.41@237.56,2549.04 198.51,2563.44 ; J2.41@237.56,2577.83 198.51,2563.44 ; J2.41@239.24,2554.86 198.51,2563.44 ; J2.41@239.24,2572.02 198.51,2563.44 ; J2.41@241.28,2554.9 272.32,2563.44 ; J2.41@241.28,2571.98 272.32,2563.44 ; J2.41@243.45,2549.2 272.32,2563.44 ; J2.41@243.45,2577.68 272.32,2563.44 ; J2.41@246.74,2543.9 272.32,2563.44 ; J2.41@246.74,2582.97 272.32,2563.44 ; v2@445.73,2021.93 453.61,2044.19 ; v2(453.61,2020.57) 453.61,2044.19 ; v2@461.5,2021.93 453.61,2044.19 ; 272.32,2563.44 453.42,2382.34 453.42,2044.38 453.61,2044.19
XMMC2DATA3: CON10.27 J2.43 J2.44 | length 2042.9
  TOP w6: v2(478.61,2050.57) 523.61,2050.57 535.61,2038.57 536.07,2038.57 594.7,1979.94 CON10.27@800.66,1979.94 ; v2@479.72,2042.65 507.61,2050.57 v2@479.72,2058.49 ; 755.16,1979.94 CON10.27@778.16,1979.94
  BOTTOM w6: J2.44@161.39,2642.18 J2.43@240.13,2642.18 298.58,2642.18 345.76,2595 478.61,2462.15 v2(478.61,2050.57) ; J2.44@162.28,2633.6 203.01,2642.18 ; J2.44@162.28,2650.76 203.01,2642.18 ; J2.44@163.96,2627.78 203.01,2642.18 ; J2.44@163.96,2656.57 203.01,2642.18 ; J2.44@166.5,2622.2 203.01,2642.18 ; J2.44@166.5,2662.16 203.01,2642.18 ; J2.43@235.02,2622.2 198.51,2642.18 ; J2.43@235.02,2662.16 198.51,2642.18 ; J2.43@237.56,2627.78 198.51,2642.18 ; J2.43@237.56,2656.57 198.51,2642.18 ; J2.43@239.24,2633.6 198.51,2642.18 ; J2.43@239.24,2650.76 198.51,2642.18 ; J2.43@241.02,2633.6 281.75,2642.18 ; J2.43@241.02,2650.76 281.75,2642.18 ; J2.43@242.7,2627.78 281.75,2642.18 ; J2.43@242.7,2656.57 281.75,2642.18 ; J2.43@245.24,2622.2 281.75,2642.18 ; J2.43@245.24,2662.16 281.75,2642.18 ; v2@470.69,2051.67 478.61,2079.57 v2@486.54,2051.67
XNRESET_EXT: CON10.61
XNRSOUT: CON10.64
XNWRESET: CON10.62
XOM2: CON13.9 R53.2 | length 3764
  TOP w8: 2172.71,1186.31 CON13.9@2172.71,1215.31 ; CON13.9@2172.71,1237.81 2172.71,1176.34 2175.76,1173.28 2175.76,1135 2254.76,1056 2418.38,1056 2446.76,1084.38 2446.76,2656 2508.76,2718 3353.76,2718 v1(3430.76,2795) 3402.79,2767.03 ; v1@3425.39,2799.49 3402.79,2767.03 ; v1@3435.25,2789.63 3402.79,2767.03
  BOTTOM w8: v4@3357.72,3137.5 3392.58,3108.18 ; v4@3375.37,3150.36 3392.58,3108.18 ; v1@3423.8,2795.7 3430.76,2830 v1@3437.72,2795.7 ; v1(3430.76,2795) 3430.76,3070 3365.76,3135 v4(3365.76,3145) 3392.58,3108.18
XOM3: CON13.10 CON13.11 R54.2 | length 4576
  TOP w8: v1@2148.76,1164.79 2153.02,1139.36 ; 2153.02,1186.31 CON13.11@2153.02,1215.31 ; CON13.11@2153.02,1237.81 2153.02,1139.36 ; v1(2155.76,1165) 2153.02,1139.36 ; v1@2162.55,1163.32 2153.02,1139.36 ; v1@2168.76,1419.75 2172.71,1407.43 ; CON13.10@2172.71,1355.93 2172.71,1416.95 v1(2175.76,1420) ; CON13.10@2172.71,1378.43 2172.71,1407.43 ; v1@2181.86,1416.57 2172.71,1407.43 ; v1@3459.53,2768.11 3440.76,2775 ; v1@3459.53,2781.89 3440.76,2775 ; 2153.02,1139.36 2249.38,1043 2423.76,1043 2465.76,1085 2465.76,2656.62 2514.14,2705 3370.76,2705 3440.76,2775 ; 2172.71,1384.61 v1(2175.76,1420) ; 2172.71,1384.61 2168.76,1419.91 2172.71,1384.77 ; 2172.71,1384.61 2182.64,1418.71 2172.71,1384.77 ; 2172.71,1384.77 v1(2175.76,1420) ; 2172.71,1407.43 v1(2175.76,1420) ; 3440.76,2775 v1(3460.76,2775) 3440.76,2775
  BOTTOM w8: v1@2148.8,1165.7 2155.76,1200 v1@2162.72,1165.7 ; v1(2155.76,1165) 2155.76,1400 ; v1@2170.24,1424.3 2155.76,1400 ; v1(2175.76,1420) 2155.76,1400 ; v1@2180.06,1414.48 2155.76,1400 ; v4@3419.29,3136.11 3450.76,3120 ; v4(3425.76,3145) 3450.76,3120 ; v4@3434.65,3151.47 3450.76,3120 ; v1@3453.84,2773.98 3450.76,2818.73 ; v1@3467.44,2777.09 3450.76,2818.73 ; 3450.76,2818.73 v1(3460.76,2775) 3450.76,2785 3450.76,3120
XPWMTOUT1: CON13.5 R25.2 | length 1307.8
  TOP w6: R25.2@1367.34,1414.48 1383.61,1380.48 ; R25.2@1373.04,1416.65 1383.61,1380.48 ; R25.2@1378.94,1417.88 1383.61,1380.48 ; R25.2@1383.61,1418.17 1383.61,1380.48 ; R25.2@1383.61,1439.07 1383.61,1325.57 1408.61,1300.57 ; R25.2@1388.29,1417.88 1383.61,1380.48 ; R25.2@1394.19,1416.65 1383.61,1380.48 ; R25.2@1399.88,1414.48 1383.61,1380.48
  TOP w7: 1408.61,1300.57 1442.61,1300.57 1455.61,1313.57 2185.61,1313.57 2212.08,1287.11 CON13.5@2212.08,1237.81 ; CON13.5@2212.08,1260.31 2212.08,1286.31
XSPICLK0/I2C_4_SDA: CON11.73
XSPICSN0/I2C_4_SCL: CON11.76
XTAL1: C22.1 R46.2 U1.5 Y2.2 | length 3178.7
  TOP w8: U1.5@2599.36,449.84 2805.41,449.84 ; U1.5@2623.97,449.84 2652.89,449.84 ; C22.1@2815.07,410 2821.94,452.92 ; C22.1@2815.17,411.57 2826.74,452.12 ; R46.2@2815.33,470.41 2830.76,429.54 ; R46.2@2817.78,482.04 2805.41,449.84 ; C22.1@2819.32,412.89 2834.78,452.12 ; C22.1@2819.69,414.27 2839.58,452.92 ; C22.1@2823.08,410.11 2826.74,452.12 ; C22.1@2823.1,409.47 2821.94,452.92 ; R46.2@2823.1,472.55 2830.76,429.54 ; R46.2@2824.95,478.26 2805.41,449.84 ; C22.1@2827.05,410.66 2834.78,452.12 ; C22.1@2827.16,411.27 2839.58,452.92 ; R46.2@2831.44,467.54 2874.45,475.2 ; R46.2@2831.44,482.85 2874.45,475.2 ; R46.2@2833.58,459.77 2874.45,475.2 ; R46.2@2833.58,490.63 2874.45,475.2 ; C22.1@2834.36,411.27 2821.94,452.92 ; C22.1@2834.47,410.66 2826.74,452.12 ; R46.2@2835.31,467.03 2805.41,449.84 ; C22.1@2838.42,409.47 2839.58,452.92 ; R46.2@2838.42,472.55 2830.76,429.54 ; C22.1@2838.44,410.11 2834.78,452.12 ; R46.2@2838.49,459.58 2805.41,449.84 ; C22.1@2841.83,414.27 2821.94,452.92 ; C22.1@2842.2,412.89 2826.74,452.12 ; R46.2@2846.19,470.41 2830.76,429.54 ; C22.1@2846.35,411.57 2834.78,452.12 ; C22.1@2846.44,410 2839.58,452.92 ; Y2.2@2940.93,402.91 2935,465.76 ; Y2.2@2948.95,404.19 2935,465.76 ; Y2.2@2956.67,406.46 2935,465.76 ; Y2.2@2974.08,416.18 2935,465.76 ; Y2.2@2980.07,421.55 2935,465.76 ; Y2.2@2985.37,427.7 2935,465.76 ; 2805.41,449.84 2830.76,473.23 2830.76,429.54 ; 2805.41,449.84 R46.2@2830.76,475.2 ; C22.1@2817.92,414.81 2830.76,429.54 ; C22.1@2817.92,414.81 2830.76,429.54 ; C22.1@2817.92,414.81 2830.76,429.54 ; C22.1@2817.92,414.81 2830.76,429.54 ; C22.1@2817.92,414.81 2830.76,429.54 ; 2821.94,452.92 2828.79,410 2826.74,452.12 ; C22.1@2825.1,410.84 2830.76,429.54 ; C22.1@2825.1,410.84 2830.76,429.54 ; C22.1@2825.1,410.84 2830.76,429.54 ; C22.1@2825.1,410.84 2830.76,429.54 ; C22.1@2825.1,410.84 2830.76,429.54 ; C22.1@2830.76,410 2830.76,429.54 ; C22.1@2830.76,410 2830.76,429.54 ; C22.1@2830.76,410 2830.76,429.54 ; C22.1@2830.76,410 2830.76,429.54 ; C22.1@2830.76,410 R46.2@2830.76,475.2 ; 2830.76,429.54 C22.1@2836.41,410.84 ; 2830.76,429.54 C22.1@2843.6,414.81 ; 2830.76,429.54 C22.1@2836.41,410.84 ; 2830.76,429.54 C22.1@2843.6,414.81 ; 2830.76,429.54 C22.1@2836.41,410.84 ; 2830.76,429.54 C22.1@2843.6,414.81 ; 2830.76,429.54 C22.1@2836.41,410.84 ; 2830.76,429.54 C22.1@2843.6,414.81 ; 2830.76,429.54 C22.1@2836.41,410.84 ; 2830.76,429.54 C22.1@2843.6,414.81 ; 2830.76,451.72 2836.46,410.39 2830.76,451.72 ; 2830.76,451.72 2825.06,410.39 2830.76,451.72 ; 2830.76,451.72 2844.29,412.26 2830.76,451.72 ; 2830.76,451.72 2817.23,412.26 2830.76,451.72 ; R46.2@2830.76,475.2 2925.56,475.2 2965.76,435 Y2.2@2965.76,410.63 2935,465.76 ; 2834.78,452.12 2832.73,410 2839.58,452.92
XTAL2: C23.2 R46.1 U1.6 Y2.1 | length 1766.7
  TOP w8: U1.6@2599.36,469.53 2735.29,469.53 2811.82,546.06 R46.1@2830.76,546.06 C23.2@2830.76,621.26 2955.13,621.26 Y2.1@2965.76,610.63 2910.07,621.26 ; U1.6@2623.97,469.53 2652.89,469.53 ; R46.1@2815.33,550.85 2830.76,591.72 ; C23.2@2817.23,619 2830.76,579.54 ; R46.1@2821.22,556.55 2783.68,517.92 ; R46.1@2823.1,548.71 2830.76,591.72 ; C23.2@2825.06,620.87 2830.76,579.54 ; R46.1@2826.56,550.53 2783.68,517.92 ; R46.1@2830.76,544.09 2783.68,517.92 ; R46.1@2830.76,548.03 2830.76,591.72 ; C23.2@2832.73,621.26 2874.45,621.26 ; C23.2@2833.12,615.56 2874.45,621.26 ; C23.2@2833.12,626.96 2874.45,621.26 ; R46.1@2834.01,537.13 2783.68,517.92 ; C23.2@2834.98,607.73 2874.45,621.26 ; C23.2@2834.98,634.79 2874.45,621.26 ; R46.1@2836.3,529.42 2783.68,517.92 ; C23.2@2836.46,620.87 2830.76,579.54 ; R46.1@2838.42,548.71 2830.76,591.72 ; C23.2@2844.29,619 2830.76,579.54 ; R46.1@2846.19,550.85 2830.76,591.72 ; Y2.1@2955.16,586.89 2910.07,621.26 ; Y2.1@2959.62,593.71 2910.07,621.26 ; Y2.1@2963.03,601.01 2910.07,621.26 ; Y2.1@2964.65,636.61 2910.07,621.26 ; Y2.1@2966.29,628.62 2910.07,621.26 ; Y2.1@2966.76,620.58 2910.07,621.26
XUCTS1: CON12.65
XUCTSN0: CON10.46
XUCTSN2/I2C_3_SDA: CON12.51 U17.4 | length 2273.8
  TOP w6: 1759.32,2814.36 CON12.51@1759.32,2837.36 ; CON12.51@1759.32,2859.86 1759.32,2739.87 1858.61,2640.57 v2(1923.61,2640.57) ; v2@1922.51,2632.65 1894.61,2640.57 v2@1922.51,2648.49 ; v2@2313.81,3256.72 2342.48,3274.16 v2@2325.05,3245.49 ; v2(2318.76,3250.43) 2392.64,3324.31 2594.92,3324.31 2670.76,3400.15 2670.76,3465 2705.76,3500 2875.76,3500 2911.23,3535.47 U17.4@2960.72,3535.47 ; 2918.11,3535.47 U17.4@2941.04,3535.47
  BOTTOM w6: v2(1923.61,2640.57) 2078.61,2640.57 2188.61,2750.57 2188.61,3015.57 2318.61,3145.57 2318.61,3231.28 2318.76,3231.43 ; v2@1924.72,2632.65 1952.61,2640.57 v2@1924.72,2648.49 ; v2@2310.94,3248.74 2318.76,3231.43 ; v2@2326.58,3248.74 2318.76,3231.43 ; 2318.76,3231.43 v2(2318.76,3250.43) 2318.76,3231.43
XUHOSTDATA0: CON10.77
XUHOSTDATA1_EXT: CON10.9
XUHOSTSTROBE0: CON10.78
XUHOSTSTROBE1_EXT: CON10.10
XUOTGDM: CON10.16 J2.11 J2.12 J7.2 | length 5757.4
  TOP w7: v5@849.86,1864.15 887.22,1861.83 ; v5(851.35,1872.52) 887.22,1861.83 ; v5@854.69,1880.34 887.22,1861.83 ; 858.35,1861.83 CON10.16@918.77,1861.83 ; 870.27,1861.83 CON10.16@896.27,1861.83
  TOP w10: J2.12@160.37,1373.78 216.35,1371.48 ; J2.12@160.37,1390.9 216.35,1393.2 ; J2.12@160.87,1363.72 216.35,1371.48 ; J2.12@160.87,1400.95 216.35,1393.2 ; J2.12@161.33,1373.72 215.4,1377.65 ; J2.12@161.33,1390.96 215.4,1387.03 ; J2.12@162.82,1373.83 215.4,1387.03 ; J2.12@162.82,1390.84 215.4,1377.65 ; J2.12@162.99,1363.78 215.4,1377.65 ; J2.12@162.99,1400.89 215.4,1387.03 ; J2.12@163.71,1374.03 216.35,1393.2 ; J2.12@163.71,1390.64 216.35,1371.48 ; J2.12@166.16,1364.34 215.4,1387.03 ; J2.12@166.16,1400.34 215.4,1377.65 ; J2.12@167.99,1364.92 216.35,1393.2 ; J2.12@167.99,1399.75 216.35,1371.48 ; J2.11@236.9,1364 186.51,1382.34 ; J2.11@236.9,1400.68 186.51,1382.34 ; J2.11@239.44,1373.74 186.51,1382.34 ; J2.11@239.44,1390.93 186.51,1382.34 ; J2.11@240.82,1373.74 293.75,1382.34 ; J2.11@240.82,1390.93 293.75,1382.34 ; J2.11@243.36,1364 293.75,1382.34 ; J2.11@243.36,1400.68 293.75,1382.34 ; J7.2@410.17,246.65 410.17,314.41 ; J7.2@410.17,281.1 410.17,314.41 ; v1@470,836.69 485.76,879.67 ; v1@481.69,834.08 485.76,879.67 ; J2.12@161.39,1382.34 186.51,1382.34 ; J2.12@161.39,1382.34 216.35,1393.2 ; J2.12@161.39,1382.34 186.51,1382.34 ; J2.12@161.39,1382.34 215.4,1387.03 ; J2.12@161.39,1382.34 186.51,1382.34 ; J2.12@161.39,1382.34 215.4,1377.65 ; J2.12@161.39,1382.34 186.51,1382.34 ; J2.12@161.39,1382.34 216.35,1371.48 ; J2.12@161.39,1382.34 J2.11@240.13,1382.34 ; J2.12@162.87,1373.84 186.51,1382.34 ; J2.12@162.87,1373.84 186.51,1382.34 ; J2.12@162.87,1373.84 186.51,1382.34 ; J2.12@162.87,1373.84 186.51,1382.34 ; J2.12@162.87,1373.84 186.51,1382.34 ; J2.12@162.87,1390.83 186.51,1382.34 ; J2.12@162.87,1390.83 186.51,1382.34 ; J2.12@162.87,1390.83 186.51,1382.34 ; J2.12@162.87,1390.83 186.51,1382.34 ; J2.12@162.87,1390.83 186.51,1382.34 ; J2.12@168.29,1365.04 186.51,1382.34 ; J2.12@168.29,1365.04 186.51,1382.34 ; J2.12@168.29,1365.04 186.51,1382.34 ; J2.12@168.29,1365.04 186.51,1382.34 ; J2.12@168.29,1365.04 186.51,1382.34 ; J2.12@168.29,1399.63 186.51,1382.34 ; J2.12@168.29,1399.63 186.51,1382.34 ; J2.12@168.29,1399.63 186.51,1382.34 ; J2.12@168.29,1399.63 186.51,1382.34 ; J2.12@168.29,1399.63 186.51,1382.34 ; 186.51,1382.34 J2.11@240.13,1382.34 ; 215.01,1382.34 162.08,1373.74 215.01,1382.34 ; 215.01,1382.34 162.08,1390.93 215.01,1382.34 ; 215.01,1382.34 164.62,1364 215.01,1382.34 ; 215.01,1382.34 164.62,1400.68 215.01,1382.34 ; J2.11@240.13,1382.34 318.42,1382.34 485.76,1215 485.76,845 v1(475.76,835) ; 410.17,314.41 444.6,348.84 444.6,385.05 474.76,415.21 474.76,834 v1(475.76,835) ; v1(475.76,835) 485.76,879.67
  BOTTOM w6: v1@471.27,841.62 490.76,850 ; v1(475.76,835) 490.76,850 ; v1@482.38,830.51 490.76,850 ; v5(851.35,1872.52) 840.51,1861.68 840.34,1861.68 836.23,1857.57 797.61,1857.57 722.61,1782.57 518.33,1782.57 490.76,1755 490.76,850
XUOTGDP: CON10.14 J2.13 J2.14 J7.3 | length 5502.7
  TOP w7: v5@847.65,1838.57 864.79,1842.15 ; v5@858.22,1825.92 864.79,1842.15 ; 870.27,1842.15 CON10.14@896.27,1842.15 ; CON10.14@918.77,1842.15 864.79,1842.15 ; 864.79,1842.15 v5(851.35,1830.92) 853.56,1830.92 864.79,1842.15
  TOP w10: J2.14@161.39,1461.08 J2.13@240.13,1461.08 ; J2.14@162.08,1452.48 215.01,1461.08 ; J2.14@162.08,1469.67 215.01,1461.08 ; J2.14@164.62,1442.74 215.01,1461.08 ; J2.14@164.62,1479.42 215.01,1461.08 ; J2.13@233.53,1443.66 185.17,1471.94 ; J2.13@233.53,1478.49 185.17,1450.22 ; J2.13@235.36,1443.08 186.12,1465.77 ; J2.13@235.36,1479.08 186.12,1456.39 ; J2.13@236.9,1442.74 186.51,1461.08 ; J2.13@236.9,1479.42 186.51,1461.08 ; J2.13@237.81,1452.77 185.17,1471.94 ; J2.13@237.81,1469.38 185.17,1450.22 ; J2.13@238.53,1442.52 186.12,1456.39 ; J2.13@238.53,1479.63 186.12,1465.77 ; J2.13@238.7,1452.57 186.12,1465.77 ; J2.13@238.7,1469.58 186.12,1456.39 ; J2.13@239.44,1452.48 186.51,1461.08 ; J2.13@239.44,1469.67 186.51,1461.08 ; J2.13@240.13,1455.63 J2.13@240.13,1461.08 ; J2.13@240.19,1452.46 186.12,1456.39 ; J2.13@240.19,1469.7 186.12,1465.77 ; J2.13@240.65,1442.46 185.17,1450.22 ; J2.13@240.65,1479.69 185.17,1471.94 ; J2.13@241.15,1452.52 185.17,1450.22 ; J2.13@241.15,1469.64 185.17,1471.94 ; J2.13@241.21,1452.52 274.68,1461.08 ; J2.13@241.21,1469.63 274.68,1461.08 ; J2.13@245.15,1443.14 274.68,1461.08 ; J2.13@245.15,1479.01 274.68,1461.08 ; J7.3@435.76,246.65 435.76,310 ; J7.3@435.76,281.1 435.76,310 ; v1@490,811.69 505.76,854.69 ; v1@501.69,809.08 505.76,854.69 ; 185.17,1450.22 J2.13@240.13,1461.08 ; 185.17,1471.94 J2.13@240.13,1461.08 ; 186.12,1456.39 J2.13@240.13,1461.08 ; 186.12,1465.77 J2.13@240.13,1461.08 ; 186.51,1461.08 J2.13@240.13,1461.08 ; 215.01,1461.08 J2.13@240.13,1461.08 ; 215.01,1461.08 J2.13@238.65,1469.57 ; 215.01,1461.08 J2.13@238.65,1452.58 ; 215.01,1461.08 J2.13@233.23,1478.37 ; 215.01,1461.08 J2.13@233.23,1443.78 ; 215.01,1461.08 J2.13@240.13,1461.08 ; 215.01,1461.08 J2.13@238.65,1469.57 ; 215.01,1461.08 J2.13@238.65,1452.58 ; 215.01,1461.08 J2.13@233.23,1478.37 ; 215.01,1461.08 J2.13@233.23,1443.78 ; 215.01,1461.08 J2.13@240.13,1461.08 ; 215.01,1461.08 J2.13@238.65,1469.57 ; 215.01,1461.08 J2.13@238.65,1452.58 ; 215.01,1461.08 J2.13@233.23,1478.37 ; 215.01,1461.08 J2.13@233.23,1443.78 ; 215.01,1461.08 J2.13@240.13,1461.08 ; 215.01,1461.08 J2.13@238.65,1469.57 ; 215.01,1461.08 J2.13@238.65,1452.58 ; 215.01,1461.08 J2.13@233.23,1478.37 ; 215.01,1461.08 J2.13@233.23,1443.78 ; J2.13@240.13,1461.08 274.68,1461.08 ; 274.68,1461.08 505.76,1230 505.76,820 v1(495.76,810) ; 435.76,310 465.76,340 465.76,385 490.76,410 490.76,805 v1(495.76,810) ; v1(495.76,810) 505.76,854.69
  BOTTOM w6: v1@488.14,812.45 501.76,841.76 ; v1@503.74,809.5 501.76,841.76 ; v5@843.84,1825.96 835.61,1846.57 ; v5@856.27,1838.46 835.61,1846.57 ; 501.76,841.76 v1(495.76,810) 501.76,816 501.76,1750.44 522.89,1771.57 727.17,1771.57 802.17,1846.57 835.61,1846.57 ; 835.61,1846.57 v5(851.35,1830.92) 851.26,1830.92 835.61,1846.57
XUOTGID: CON10.12 J2.15 J2.16 J7.4 | length 5760.2
  TOP w6: CON10.12@918.77,1822.47 963.51,1822.47 ; CON10.12@941.27,1822.47 963.51,1822.47 ; v2(973.61,1832.57) 963.51,1822.47
  TOP w10: J2.16@161.39,1539.82 J2.15@240.13,1539.82 ; J2.16@162.08,1531.22 215.01,1539.82 ; J2.16@162.08,1548.41 215.01,1539.82 ; J2.16@164.62,1521.48 215.01,1539.82 ; J2.16@164.62,1558.16 215.01,1539.82 ; J2.15@229.04,1524.86 284.97,1494.98 ; J2.15@233.53,1522.4 185.17,1550.68 ; J2.15@233.53,1557.23 185.17,1528.96 ; J2.15@234.46,1533.32 284.97,1494.98 ; J2.15@235.36,1521.82 186.12,1544.51 ; J2.15@235.36,1557.82 186.12,1535.13 ; J2.15@236.9,1521.48 186.51,1539.82 ; J2.15@236.9,1558.16 186.51,1539.82 ; J2.15@237.81,1531.51 185.17,1550.68 ; J2.15@237.81,1548.12 185.17,1528.96 ; J2.15@238.53,1521.26 186.12,1535.13 ; J2.15@238.53,1558.37 186.12,1544.51 ; J2.15@238.7,1531.31 186.12,1544.51 ; J2.15@238.7,1548.32 186.12,1535.13 ; J2.15@239.44,1531.22 186.51,1539.82 ; J2.15@239.44,1548.41 186.51,1539.82 ; J2.15@240.19,1531.2 186.12,1535.13 ; J2.15@240.19,1548.44 186.12,1544.51 ; J2.15@240.65,1521.2 185.17,1528.96 ; J2.15@240.65,1558.43 185.17,1550.68 ; J2.15@241.15,1531.26 185.17,1528.96 ; J2.15@241.15,1548.38 185.17,1550.68 ; J2.15@246.63,1545.49 284.97,1494.98 ; J2.15@255.09,1550.91 284.97,1494.98 ; J7.4@461.35,246.65 461.35,310.59 ; J7.4@461.35,281.1 461.35,310.59 ; v1@510,786.69 525.76,829.7 ; v1@510.28,787.45 505.76,770 ; v1@520.13,780.89 505.76,770 ; v1@521.69,784.08 525.76,829.7 ; 185.17,1528.96 J2.15@240.13,1539.82 ; 185.17,1550.68 J2.15@240.13,1539.82 ; 186.12,1535.13 J2.15@240.13,1539.82 ; 186.12,1544.51 J2.15@240.13,1539.82 ; 215.01,1539.82 J2.15@240.13,1539.82 ; 215.01,1539.82 J2.15@238.65,1548.31 ; 215.01,1539.82 J2.15@238.65,1531.32 ; 215.01,1539.82 J2.15@233.23,1557.11 ; 215.01,1539.82 J2.15@233.23,1522.52 ; 215.01,1539.82 J2.15@240.13,1539.82 ; 215.01,1539.82 J2.15@238.65,1548.31 ; 215.01,1539.82 J2.15@238.65,1531.32 ; 215.01,1539.82 J2.15@233.23,1557.11 ; 215.01,1539.82 J2.15@233.23,1522.52 ; 215.01,1539.82 J2.15@240.13,1539.82 ; 215.01,1539.82 J2.15@238.65,1548.31 ; 215.01,1539.82 J2.15@238.65,1531.32 ; 215.01,1539.82 J2.15@233.23,1557.11 ; 215.01,1539.82 J2.15@233.23,1522.52 ; 215.01,1539.82 J2.15@240.13,1539.82 ; 215.01,1539.82 J2.15@238.65,1548.31 ; 215.01,1539.82 J2.15@238.65,1531.32 ; 215.01,1539.82 J2.15@233.23,1557.11 ; 215.01,1539.82 J2.15@233.23,1522.52 ; J2.15@240.13,1539.82 525.76,1254.19 525.76,1231.21 525.76,790 505.76,770 ; 461.35,310.59 480.76,330 480.76,370 505.76,395 505.76,770 ; 505.76,770 v1(515.76,785) 525.76,829.7
  BOTTOM w6: v1@508.47,788.29 526.33,818.17 ; v1@523.61,783.46 526.33,818.17 ; v2@967.32,1837.51 949.89,1808.84 ; v2@978.56,1826.28 949.89,1808.84 ; 526.33,818.17 v1(515.76,785) 526.33,785 526.33,1735.57 876.61,1735.57 v2(973.61,1832.57) 949.89,1808.84
XUOTGVBUS: C89.2 CON11.24 J2.9 J2.10 J7.1 | length 10223.8
  TOP w10: J2.10@161.39,1303.6 J2.9@240.13,1303.6 ; J2.10@162.08,1295 215.01,1303.6 ; J2.10@162.08,1312.19 215.01,1303.6 ; J2.10@164.62,1285.26 215.01,1303.6 ; J2.10@164.62,1321.94 215.01,1303.6 ; J2.9@233.53,1286.18 185.17,1314.46 ; J2.9@233.53,1321.01 185.17,1292.74 ; J2.9@235.36,1285.6 186.12,1308.29 ; J2.9@235.36,1321.6 186.12,1298.91 ; J2.9@236.9,1285.26 186.51,1303.6 ; J2.9@236.9,1321.94 186.51,1303.6 ; J2.9@237.81,1295.29 185.17,1314.46 ; J2.9@237.81,1311.9 185.17,1292.74 ; J2.9@238.53,1285.04 186.12,1298.91 ; J2.9@238.53,1322.15 186.12,1308.29 ; J2.9@238.7,1295.09 186.12,1308.29 ; J2.9@238.7,1312.1 186.12,1298.91 ; J2.9@239.44,1295 186.51,1303.6 ; J2.9@239.44,1312.19 186.51,1303.6 ; J2.9@240.19,1294.98 186.12,1298.91 ; J2.9@240.19,1312.22 186.12,1308.29 ; J2.9@240.24,1294.98 293.97,1300 ; J2.9@240.65,1284.98 185.17,1292.74 ; J2.9@240.65,1322.21 185.17,1314.46 ; J2.9@241.15,1295.04 185.17,1292.74 ; J2.9@241.15,1312.16 185.17,1314.46 ; J2.9@241.39,1312.13 293.97,1300 ; J2.9@242.11,1285.08 293.97,1300 ; J2.9@244.56,1321.69 293.97,1300 ; J7.1@384.58,246.65 384.58,318.82 420.76,355 C89.2@420.76,415.63 ; J7.1@384.58,281.1 384.58,316.02 ; C89.2@408.16,413.94 420.76,367.91 ; C89.2@409.84,414.05 419.58,372.22 ; C89.2@410.6,419.45 426.39,448.46 ; C89.2@421.76,415.12 419.58,372.22 ; C89.2@422.73,415.63 426.39,448.46 ; C89.2@433.36,413.94 420.76,367.91 ; C89.2@435.4,416.68 426.39,448.46 ; v1@2481.87,2300.43 2516.12,2275.21 ; v1(2485.76,2305) 2516.12,2275.21 ; v1@2485.76,2305.57 2516.12,2275.21 ; v1@2490.25,2308.98 2516.12,2275.21 ; 2758.9,2275.21 CON11.24@2793.9,2275.21 ; CON11.24@2816.4,2275.21 2516.12,2275.21 ; 185.17,1292.74 J2.9@240.13,1303.6 ; 185.17,1314.46 J2.9@240.13,1303.6 ; 186.12,1298.91 J2.9@240.13,1303.6 ; 186.12,1308.29 J2.9@240.13,1303.6 ; 186.51,1303.6 J2.9@240.13,1303.6 ; 215.01,1303.6 J2.9@240.13,1303.6 ; 215.01,1303.6 J2.9@238.65,1312.09 ; 215.01,1303.6 J2.9@238.65,1295.1 ; 215.01,1303.6 J2.9@233.23,1320.89 ; 215.01,1303.6 J2.9@233.23,1286.3 ; 215.01,1303.6 J2.9@240.13,1303.6 ; 215.01,1303.6 J2.9@238.65,1312.09 ; 215.01,1303.6 J2.9@238.65,1295.1 ; 215.01,1303.6 J2.9@233.23,1320.89 ; 215.01,1303.6 J2.9@233.23,1286.3 ; 215.01,1303.6 J2.9@240.13,1303.6 ; 215.01,1303.6 J2.9@238.65,1312.09 ; 215.01,1303.6 J2.9@238.65,1295.1 ; 215.01,1303.6 J2.9@233.23,1320.89 ; 215.01,1303.6 J2.9@233.23,1286.3 ; 215.01,1303.6 J2.9@240.13,1303.6 ; 215.01,1303.6 J2.9@238.65,1312.09 ; 215.01,1303.6 J2.9@238.65,1295.1 ; 215.01,1303.6 J2.9@233.23,1320.89 ; 215.01,1303.6 J2.9@233.23,1286.3 ; J2.9@240.13,1303.6 293.97,1300 ; J2.9@240.13,1303.6 243.73,1300 379.55,1300 450.45,1229.1 450.45,472.51 426.39,448.46 ; C89.2@410.22,417.3 426.39,448.46 ; C89.2@410.22,417.3 426.39,448.46 ; C89.2@410.22,417.3 426.39,448.46 ; v1(415.76,415) 426.39,448.46 ; v1(415.76,415) 426.39,448.46 ; v1(415.76,415) 420.76,373.3 ; v1(415.76,415) 426.39,448.46 ; v1(415.76,415) 420.76,373.38 ; v1(415.76,415) 419.58,372.22 ; 420.76,367.91 C89.2@420.76,415.63 ; 420.76,373.3 409.87,413.86 420.76,373.38 ; 420.76,373.3 421.75,415.29 420.76,373.38 ; C89.2@420.76,415.63 426.39,415.63 426.39,448.46 ; C89.2@421.61,413.68 426.39,448.46 ; C89.2@421.61,413.68 426.39,448.46 ; C89.2@421.61,413.68 426.39,448.46
  BOTTOM w10: v1@409.78,414.56 415.76,374 v1@421.74,414.56 ; v1(415.76,415) 415.76,130 475.76,70 1530.76,70 1575.76,115 1575.76,480 1681.19,585.43 2300.33,585.43 2381.76,504 2619.76,504 2690.76,575 2690.76,1680 2485.76,1885 v1(2485.76,2305) ; v1@2479.78,2304.56 2485.76,2264 v1@2491.74,2304.56
XURTS1: CON12.62
XURTSN0: CON10.47
XURTSN2/I2C_3_SCL: CON12.49 U17.5 | length 2372.2
  TOP w6: 1779.01,2814.36 CON12.49@1779.01,2837.36 ; CON12.49@1779.01,2859.86 1779.01,2745.17 1858.61,2665.57 v2(1888.61,2665.57) 1859.61,2665.57 ; v2@1887.51,2657.65 1859.61,2665.57 ; v2@1887.51,2673.49 1859.61,2665.57 ; v2(2298.61,3210.57) 2539.16,3210.57 2637.59,3309 2924.76,3309 3021.76,3406 3021.76,3516 3040.76,3535 ; v2@2299.72,3202.65 2327.61,3210.57 v2@2299.72,3218.49 ; 3040.76,3535 3061.11,3535.47 3055.76,3535 3040.76,3535
  BOTTOM w6: v2(1888.61,2665.57) 2068.61,2665.57 2163.61,2760.57 2163.61,3023.57 2298.61,3158.57 v2(2298.61,3210.57) 2298.61,3181.57 ; v2@1889.72,2657.65 1917.61,2665.57 v2@1889.72,2673.49 ; v2@2290.69,3209.47 2298.61,3181.57 ; v2@2306.54,3209.47 2298.61,3181.57
XURXD0: CON10.44
XURXD1: CON12.60 U9.29 | length 1287.8
  TOP w6: v1@1342.84,3316.1 1350.76,3344 v1@1358.68,3316.1 ; v1(1350.76,3315) 1350.76,3451.87 1473.54,3574.65 1515.41,3574.65 1525.97,3585.21 U9.29@1525.97,3650 ; 1525.97,3599.5 U9.29@1525.97,3623.5 ; v2@1648.67,3184.28 1677.34,3166.84 v2@1659.9,3195.51 ; v2(1653.61,3190.57) 1679.95,3164.24 1679.95,3037.28 1680.58,3036.65 CON12.60@1680.58,2977.98 ; CON12.60@1680.58,3000.48 1680.58,3023.48
  BOTTOM w6: v1@1346.32,3308.34 1365.19,3300.57 ; v1(1350.76,3315) 1365.19,3300.57 ; v1@1357.42,3319.44 1365.19,3300.57 ; v2@1645.72,3191.85 1653.61,3215.57 ; v2(1653.61,3190.57) 1653.61,3215.57 ; v2@1661.51,3191.85 1653.61,3215.57 ; 1365.19,3300.57 1568.61,3300.57 1653.61,3215.57
XURXD2/UART_AUDIO_RXD: CON12.54 U9.36 | length 1125.4
  TOP w6: 1663.77,3599.5 U9.36@1663.77,3623.5 ; U9.36@1663.77,3650 1663.77,3558.01 1592.76,3487 1465.33,3487 1409.76,3431.43 1409.76,3351 1445.76,3315 1599.18,3315 1693.61,3220.57 1693.61,3175.57 1739.64,3129.54 CON12.54@1739.64,2977.98 ; CON12.54@1739.64,3000.48 1739.64,3023.48
XUTXD0: CON10.45
XUTXD1: CON12.63
XUTXD2/UART_AUDIO_TXD: CON12.56 U9.41 | length 1322.2
  TOP w6: v1@1544.66,3332.08 1516.76,3340 v1@1544.66,3347.92 ; v1(1545.76,3340) 1488.89,3340 1463.63,3365.26 1463.63,3416 1500.63,3453 1606.84,3453 1762.19,3608.35 ; v2@1699.15,3127.24 1706.97,3109.93 ; v2@1714.79,3127.24 1706.97,3109.93 ; CON12.56@1719.95,2977.98 1719.95,3096.95 1706.97,3109.93 ; CON12.56@1719.95,3000.48 1719.95,3023.48 ; U9.41@1762.19,3623.5 1762.19,3608.35 ; U9.41@1762.19,3650 1762.19,3608.35 ; 1706.97,3109.93 v2(1706.97,3128.93) 1706.97,3109.93
  BOTTOM w6: v1@1542.11,3332.88 1575.53,3320.23 ; v1(1545.76,3340) 1575.53,3320.23 ; v1@1545.76,3341.47 1554.29,3341.47 1706.97,3188.79 v2(1706.97,3128.93) ; v1@1550.9,3346.13 1575.53,3320.23 ; v2@1699.05,3130.03 1706.97,3157.93 v2@1714.89,3130.03
XVSYS_OE: CON13.39
XVVSYNC_LDI: CON13.34